# Altium PCB PCB1.PcbDoc
Units mil, origin at the board's own origin, x right, y up, seen from the top; angles counter-clockwise.
Board outline 6000 x 4000 mil, 2 copper layers (Top Layer, Bottom Layer); 58 components, 103 nets, 336 pads, 0 vias.
Unrouted connection lines stored in the file: 212.
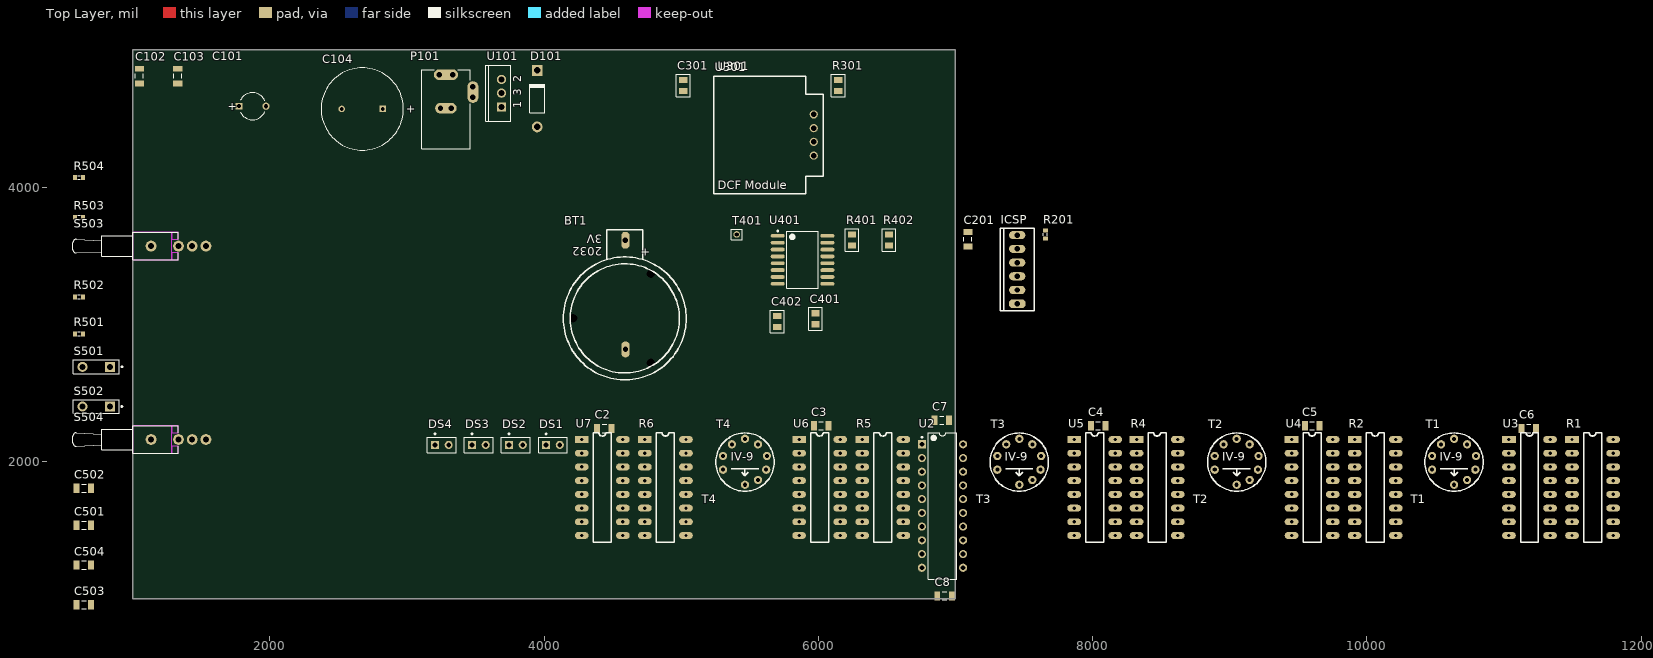
[diagram p0: Top Layer view]
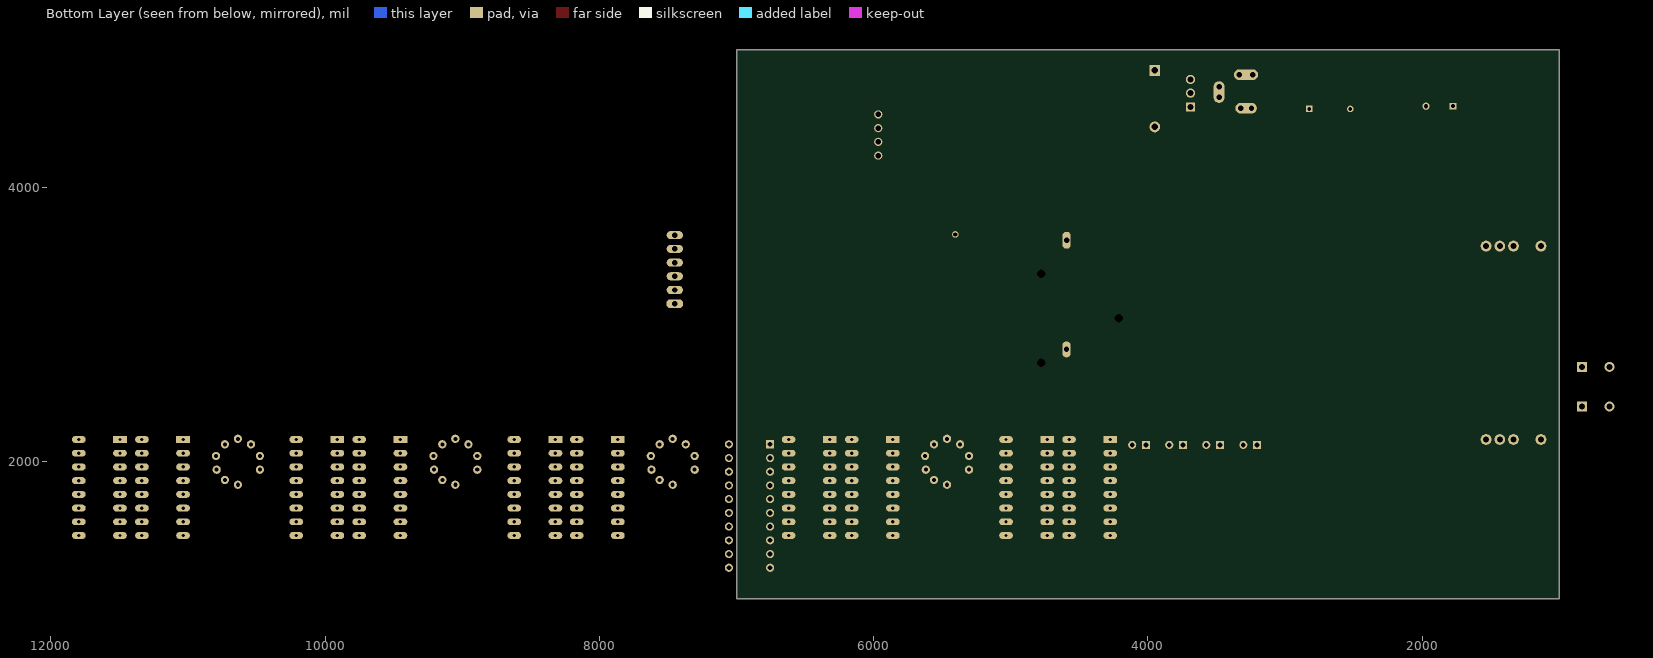
[diagram p1: Bottom Layer view, seen from below]

## Layer stack, top to bottom
Top Layer: signal copper 1.4
Dielectric: dielectric 12.6, FR-4, Dk 4.8
Bottom Layer: signal copper 1.4

## Board outline
1000,1000 7000,1000 7000,5000 1000,5000

## Design rules (kind name [scope] priority, off if disabled: settings)
Clearance [All] p1: gap=10
PolygonConnect [All] p1: connectstyle=Relief reliefconductorwidth=10 reliefentries=4 polygonreliefangle="90 Angle"
RoomDefinition Main [InComponentClass('Main')] p1: confinementstyle=ConfineIn formatcopy=TRUE lockcomponents=FALSE outline 1660,1130 11855,1130 11855,2320 1660,2320
RoomDefinition RTC [InComponentClass('RTC')] p2: confinementstyle=ConfineIn formatcopy=TRUE lockcomponents=FALSE outline 3840,2585 6710,2585 6710,3805 3840,3805
RoomDefinition "Power Supply" [InComponentClass('Power Supply')] p3: confinementstyle=ConfineIn formatcopy=TRUE lockcomponents=FALSE outline 1005,4270 4110,4270 4110,5000 1005,5000
RoomDefinition ICSP [InComponentClass('ICSP')] p4: confinementstyle=ConfineIn formatcopy=TRUE lockcomponents=FALSE outline 7045,3090 7860,3090 7860,3810 7045,3810
RoomDefinition DCF [InComponentClass('DCF')] p5: confinementstyle=ConfineIn formatcopy=TRUE lockcomponents=FALSE outline 4955,3940 6320,3940 6320,4930 4955,4930
RoomDefinition Buttons [InComponentClass('Buttons')] p6: confinementstyle=ConfineIn formatcopy=TRUE lockcomponents=FALSE outline 1585,910 1585,4295 455,4295 455,910
RoutingVias [All] p1: holewidth=28 width=50 viastyle="Through Hole" minholewidth=28 minwidth=50 maxholewidth=28 maxwidth=50
SilkscreenOverComponentPads [All] p1: minsilkscreentomaskgap=10
SolderMaskExpansion [All] p1: expansion=4
Width [All] p1: maxlimit=10 minlimit=10 preferedwidth=10
27 further rules are at their usual default settings.

## Classes and differential pairs
component class RTC: BT1 C401 C402 R401 R402 T401 U401
component class "Power Supply": C101 C102 C103 C104 D101 P101 U101
component class Main: C2 C3 C4 C5 C6 C7 C8 DS1 DS2 DS3 DS4 R1 R2 R4 R5 R6 T1 T2 T3 T4 U2 U3 U4 U5 U6 U7
component class ICSP: C201 ICSP R201
component class DCF: C301 R301 U301
component class Buttons: C501 C502 C503 C504 R501 R502 R503 R504 S501 S502 S503 S504

## Components (designator, comment, footprint, x,y, rotation, side; value= is the part's Value field where it differs from the comment)
BT1 "Battery" 2032HOLDER 4595,3725 r90 top
C2 "Cap Semi" CAPC3216L 4440,2240 r0 top
C3 "Cap Semi" CAPC3216L 6020,2260 r0 top
C4 "Cap Semi" CAPC3216L 8040,2260 r0 top
C5 "Cap Semi" CAPC3216L 9600,2260 r0 top
C6 "Cap Semi" CAPC3216L 11180,2240 r0 top
C7 "Cap Semi" CAPC3216L 6900,2300 r0 top
C8 "Cap Semi" CAPC3216L 6920,1020 r0 top
C101 "Cap Pol1" CAPPR5-5x5 1875,4590 r0 top
C102 "Cap Semi" CAPC3216L 1050,4810 r90 top
C103 "Cap Semi" CAPC3216L 1330,4810 r90 top
C104 "Cap Pol1" RB7.6-15 2675,4570 r0 top
C201 "Cap Semi" CAPC3216L 7090,3620 r90 top
C301 "Cap" "RCL 0805" 5015,4740 r90 top
C401 "Cap" "RCL 0805" 5980,3040 r90 top
C402 "Cap" "RCL 0805" 5700,3020 r90 top
C501 "Cap Semi" CAPC3216L 645,1535 r180 top
C502 "Cap Semi" CAPC3216L 645,1805 r180 top
C503 "Cap Semi" CAPC3216L 645,955 r180 top
C504 "Cap Semi" CAPC3216L 645,1245 r180 top
D101 "Diode 1N4004" DIO10.46-5.3x2.8 3950,4645 r90 top
DS1 "Lamp" PIN2 4015,2120 r0 top
DS2 "Lamp" PIN2 3745,2120 r0 top
DS3 "Lamp" PIN2 3475,2120 r0 top
DS4 "Lamp" PIN2 3205,2120 r0 top
ICSP "Header 6" "MOLEX 22-23-2061" 7450,3400 r90 top
P101 "PWR2.5" KLD-0202 3285,4280 r90 top
R1 "Res Pack3" DIP16 11495,2160 r0 top
R2 "Res Pack3" DIP16 9910,2160 r0 top
R4 "Res Pack3" DIP16 8320,2160 r0 top
R5 "Res Pack3" DIP16 6320,2160 r0 top
R6 "Res Pack3" DIP16 4735,2160 r0 top
R201 "Res3" RESC1608L 7655,3655 r90 top
R301 "Res Semi" "RCL 0805" 6145,4740 r90 top
R401 "Res Semi" "RCL 0805" 6245,3615 r90 top
R402 "Res Semi" "RCL 0805" 6515,3615 r90 top
R501 "Res3" RESC1608L 610,2930 r180 top
R502 "Res3" RESC1608L 610,3200 r180 top
R503 "Res3" RESC1608L 610,3780 r180 top
R504 "Res3" RESC1608L 610,4070 r180 top
S501 "SW-PB" SPST-2 735,2690 r180 top
S502 "SW-PB" SPST-2 735,2400 r180 top
S503 "SW-SPDT" TL36WW15050 1335,3570 r180 top
S504 "SW-SPDT" TL36WW15050 1335,2160 r180 top
T1 "IV-9" IV-9 10635,1995 r0 top
T2 "IV-9" IV-9 9050,1995 r0 top
T3 "IV-9" IV-9 7465,1995 r0 top
T4 "IV-9" IV-9 5465,1995 r0 top
T401 "TESTPOINT" "TEST POINT 1" 5405,3655 r90 top
U2 "PIC18F14K50-I/P" PDIP300-P20 6905,1675 r0 top
U3 "TPIC6C596" DIP16 11035,2160 r0 top
U4 "TPIC6C596" DIP16 9450,2160 r0 top
U5 "TPIC6C596" DIP16 7865,2160 r0 top
U6 "TPIC6C596" DIP16 5860,2160 r0 top
U7 "TPIC6C596" DIP16 4275,2160 r0 top
U101 "L7805ABV" TO220ABN 3690,4685 r90 top
U301 "DCF Module Reichelt" "DCF MODUL REICHELT" 5620,4380 r0 top
U401 "DS3231" WSO16_M 5885,3470 r0 top

## Footprints (in the part's own frame and the unit in brackets; to place one, negate y for a bottom-side part, rotate by r counter-clockwise, add the part's x,y. Pads: shape width x height; smd on the part's side, far side on the other; paste and mask are expansions set on the pad)
2032HOLDER [mm] "Keystone Electronics - Cat No 103 - 20mm Lithium Coin Cell Battery Holder"
  oct 3x1.5 hole 1: 1(-2.846,0.051)
  oval 3x1.5 hole 1: 2(-23.063,0.024)
  round 1.2 hole 1.575 unplated: ""(-25.572,-4.615) ""(-17.323,9.673) ""(-9.074,-4.615)
  silkscreen extent -28.7,-11.23 -0.89,11.53, body extent -28.72,-11.19 -0.87,11.52, height 6
CAPC3216L [mm] "Chip Capacitor, Body 3.2x1.6mm, IPC High Density"
  rect 1.1x1.7 smd: 1(-1.35,0) 2(1.35,0)
  silkscreen extent -0.4,-0.75 0.4,0.75, body extent -1.7,-0.9 1.7,0.9, height 1.3
CAPPR5-5x5 [mm] "Capacitor, Electrolytic, Radial; Body 5 x 5 mm (Dia.xH typ); Pin Spacing 5 mm (typ)"
  rect 1.25x1.25 hole 0.75: 1(-2.5,0)
  round 1.35 hole 0.8: 2(2.5,0)
  silkscreen extent -2.26,-2.5 2.27,2.5
"DCF MODUL REICHELT" [mil] "DCF 77 Empfängermodul Reichelt KUNDOXT / 950-018"
  round 60 hole 39.37: 0(346.46,150) 1(346.46,50) 2(346.46,-50) 3(346.46,-150)
  silkscreen extent -382,-430 417,429
DIO10.46-5.3x2.8 [mm] "Diode, Axial; Body 5.2 x 2.7 mm (LxDia. max), Lead Dia. 0.86 mm (max)"
  round 2 hole 1.2: 1(-5.23,0)
  rect 2x2 hole 1.2: 2(5.23,0)
  silkscreen extent -2.65,-1.4 2.75,1.4
DIP16 [mil]
  rect 100x50 hole 25: 1(0,0)
  oval 100x50 hole 25: 2(0,-100) 3(0,-200) 4(0,-300) 5(0,-400) 6(0,-500) 7(0,-600) 8(0,-700) 9(300,-700) 10(300,-600) 11(300,-500) 12(300,-400) 13(300,-300) 14(300,-200) 15(300,-100) 16(300,0)
  silkscreen extent 85,-750 215,50
IV-9 [mil] "Russian Numitron Display Tube"
  round 60 hole 29.53: 1(0,-165) 2(95,-130) 3(155,-55) 4(160,45) 5(95,130) 6(0,170) 7(-95,130) 8(-160,45) 9(-160,-55)
  silkscreen extent -213,-213 213,213
KLD-0202 [mm] "DC Power Jack, 2.5mm, KLD Series, PCB Mount"
  oval 2x4.5 all layers, no hole: 1(13.7,0)
  round 1.5 hole 1: 1A(13.7,-1.25) 1B(13.7,1.25) 2A(7.5,-1) 2B(7.5,1) 3A(9.5,-5) 3B(11.5,-5)
  oval 2x4 all layers, no hole: 2(7.5,0)
  oval 4x2 all layers, no hole: 3(10.5,-5)
  silkscreen extent 0,-4.5 14.6,4.5
"MOLEX 22-23-2061" [mm] "2.54mm (.100\") Pitch KK® Solid Header, Vertical, with Friction Lock, 2 Circuits, Tin (Sn) Plating"
  oct 1.5x3 hole 1: 1(-6.35,0)
  oval 1.5x3 hole 1: 2(-3.81,0) 3(-1.27,0) 4(1.27,0) 5(3.81,0) 6(6.35,0)
  silkscreen extent -7.62,-3.18 7.62,3.18, body extent -7.62,-3.18 7.62,3.18, height 10.66
PDIP300-P20 [mm] "DIP, 20-Leads, Row Spacing 7.62mm, Pitch 2.54mm, Body 25.9x6.6mm"
  rect 1.5x1.5 hole 0.9: 1(-3.81,11.43)
  round 1.5 hole 0.9: 2(-3.81,8.89) 3(-3.81,6.35) 4(-3.81,3.81) 5(-3.81,1.27) 6(-3.81,-1.27) 7(-3.81,-3.81) 8(-3.81,-6.35) 9(-3.81,-8.89) 10(-3.81,-11.43) 11(3.81,-11.43) 12(3.81,-8.89) 13(3.81,-6.35) 14(3.81,-3.81) 15(3.81,-1.27) 16(3.81,1.27) 17(3.81,3.81) 18(3.81,6.35) 19(3.81,8.89) 20(3.81,11.43)
  silkscreen extent -3.93,-13.6 2.65,13.6, body extent -3.3,-13.57 3.3,13.57, height 5.34
PIN2 [mm] "Photosensitive Diode; 2 Leads"
  rect 1.5x1.5 hole 0.9: 1(0,0)
  round 1.5 hole 0.9: 2(2.54,0)
  silkscreen extent -1.4,-1.4 3.94,2.17
RB7.6-15 [mm] "Polarized Capacitor (Radial); 2 Leads"
  rect 1.2x1.2 hole 0.7: 1(3.81,0)
  round 1.2 hole 0.7: 2(-3.81,0)
  silkscreen extent -7.62,-7.62 7.62,7.62
"RCL 0805" [mil]
  rect 45x60 smd: 1(-40,0) 2(40,0)
  silkscreen extent -82,-50 82,50, body extent -50,-30 50,30, height 31
RESC1608L [mm] "Chip Resistor, Body 1.6x0.8mm, IPC High Density"
  rect 0.7x0.9 smd: 1(-0.75,0) 2(0.75,0)
  silkscreen extent -0.2,-0.35 0.2,0.35, body extent -0.85,-0.48 0.85,0.48, height 0.9
SPST-2 [mm] "Circuit Breaker; 2 Leads"
  rect 1.85x1.85 hole 1.1: 1(-2.54,0)
  round 1.85 hole 1.1: 2(2.54,0)
  silkscreen extent -4.89,-1.27 4.28,1.27
"TEST POINT 1" [mm]
  round 1.2 hole 0.8: 1(0,0)
  silkscreen extent -1,-1 1,1
TL36WW15050 [mm] "SPDT Subminiature Toggle Switch, Right Angle Mounting, Vertical Actuation"
  round 2 hole 1.1: 1(0,0) 2(-2.54,0) 3(-5.08,0) M(5.08,0)
  Top Layer keep-out region: 0,-1.27 0,-2.54 1.27,-2.54 1.27,-1.27
  Top Layer keep-out region: 0,2.54 0,1.27 1.27,1.27 1.27,2.54
  Top Layer keep-out region: 1.27,2.54 1.27,-2.54 8.509,-2.54 8.509,2.54
  silkscreen extent 0,-2.54 19.56,2.54
TO220ABN [mm] "TO, Thru-Hole, Vertical, Heatsink Mounted; 3 In-Line Leads; Pitch 2.54 mm; Pin sequence 1, 3, 2"
  rect 1.7x1.7 hole 1.1: 1(-2.54,0)
  round 1.7 hole 1.1: 2(2.54,0) 3(0,0)
  silkscreen extent -5.2,-1.7 5.2,2.9
WSO16_M [mm] "16-Pin Small Outline Integrated Circuit 1.27 mm Pitch, IPC Low Density"
  oval 2.6x0.7 smd: 1(-4.6,4.445) 2(-4.6,3.175) 3(-4.6,1.905) 4(-4.6,0.635) 5(-4.6,-0.635) 6(-4.6,-1.905) 7(-4.6,-3.175) 8(-4.6,-4.445) 9(4.6,-4.445) 10(4.6,-3.175) 11(4.6,-1.905) 12(4.6,-0.635) 13(4.6,0.635) 14(4.6,1.905) 15(4.6,3.175) 16(4.6,4.445)
  silkscreen extent -4.72,-5.25 2.9,5.47, body extent -3.75,-5.25 3.75,5.25, height 2.65

## Part data
BT1: "Multicell Battery"
C2 C3 C4 C5 C6 C7 C8 C102 C103 C201 C501 C502 C503 C504: "Capacitor (Semiconductor SIM Model)"
C101 C104: "Polarized Capacitor (Radial)"
C301 C401 C402: "Capacitor"
D101: "1 Amp General Purpose Rectifier"
DS1 DS2 DS3 DS4: "Incandescent Bulb"
ICSP: "Header, 6-Pin"
P101: "Low Voltage Power Supply Connector"
R1 R2 R4 R5 R6: "Isolated Resistor Network"
R201 R501 R502 R503 R504: "Resistor"
R301 R401 R402: "Semiconductor Resistor"
S501 S502: "Switch"
S503 S504: "SPDT Subminiature Toggle Switch, Right Angle Mounting, Vertical Actuation"
U2: "USB Flash Microcontroller with nanoWatt XLP Technology, 20-pin PDIP, Industrial Temperature"
U101: "Precision 1A Regulator"
U401: "Extremely Accurate I²C-Integrated RTC/TCXO/Crystal"

## Nets (pads, with @x,y where several pads share a name; then routed paths per layer and width w, separated by ;. In a path a pad name is that pad's centre, name@x,y a point inside that pad or via, vN(x,y) a via of type N, cw(c..) or ccw(c..) an arc to the next point about the centre after c; other vN are vias at no path point)
32KHZ: R401.1 T401.1 U401.1
BTNXT: C501.2 R501.1 S501.2 U2.6
BTSET: C502.2 R502.1 S502.2 U2.5
CLR: U2.12 U3.7 U4.7 U5.7 U6.7 U7.7
DCFSIG: C301.2 R301.1 U2.15 U2.16 U301.1
G: U2.10 U3.8 U4.8 U5.8 U6.8 U7.8
GND: BT1.2 C2.1 C3.1 C4.1 C5.1 C6.1 C7.1 C8.1 C201.1 C301.1 C401.1 C402.1 C501.1 C502.1 C503.1 C504.1 ICSP.3 P101.2 P101.2A P101.2B P101.3 P101.3A P101.3B S501.1 S502.1 S503.3 S504.3 U2.20 U3.16 U4.16 U5.16 U6.16 U7.16 U101.3 U301.3 U401.4 U401.5 U401.6 U401.7 U401.8 U401.9 U401.10 U401.11 U401.12 U401.13
MCLR: C201.2 ICSP.1 R201.1 U2.4
NetC101_1: C101.1 C102.2 D101.2 U101.1
NetC101_2: C101.2 C102.1 C103.1 C104.2
NetD101_1: D101.1 P101.1 P101.1A P101.1B
NetDS1_2: DS1.2 R6.16
NetDS2_2: DS2.2 R6.15
NetDS3_2: DS3.2 R6.14
NetDS4_2: DS4.2 R6.13
NetR1_1: R1.1 U3.14
NetR1_2: R1.2 U3.13
NetR1_3: R1.3 U3.12
NetR1_4: R1.4 U3.11
NetR1_5: R1.5 U3.6
NetR1_6: R1.6 U3.5
NetR1_7: R1.7 U3.4
NetR1_8: R1.8 U3.3
NetR1_9: R1.9 T1.2
NetR1_10: R1.10 T1.7
NetR1_11: R1.11 T1.6
NetR1_12: R1.12 T1.9
NetR1_13: R1.13 T1.8
NetR1_14: R1.14 T1.4
NetR1_15: R1.15 T1.3
NetR1_16: R1.16 T1.5
NetR2_1: R2.1 U4.14
NetR2_2: R2.2 U4.13
NetR2_3: R2.3 U4.12
NetR2_4: R2.4 U4.11
NetR2_5: R2.5 U4.6
NetR2_6: R2.6 U4.5
NetR2_7: R2.7 U4.4
NetR2_8: R2.8 U4.3
NetR2_9: R2.9 T2.2
NetR2_10: R2.10 T2.7
NetR2_11: R2.11 T2.6
NetR2_12: R2.12 T2.9
NetR2_13: R2.13 T2.8
NetR2_14: R2.14 T2.4
NetR2_15: R2.15 T2.3
NetR2_16: R2.16 T2.5
NetR4_1: R4.1 U5.14
NetR4_2: R4.2 U5.13
NetR4_3: R4.3 U5.12
NetR4_4: R4.4 U5.11
NetR4_5: R4.5 U5.6
NetR4_6: R4.6 U5.5
NetR4_7: R4.7 U5.4
NetR4_8: R4.8 U5.3
NetR4_9: R4.9 T3.2
NetR4_10: R4.10 T3.7
NetR4_11: R4.11 T3.6
NetR4_12: R4.12 T3.9
NetR4_13: R4.13 T3.8
NetR4_14: R4.14 T3.4
NetR4_15: R4.15 T3.3
NetR4_16: R4.16 T3.5
NetR5_1: R5.1 U6.14
NetR5_2: R5.2 U6.13
NetR5_3: R5.3 U6.12
NetR5_4: R5.4 U6.11
NetR5_5: R5.5 U6.6
NetR5_6: R5.6 U6.5
NetR5_7: R5.7 U6.4
NetR5_8: R5.8 U6.3
NetR5_9: R5.9 T4.2
NetR5_10: R5.10 T4.7
NetR5_11: R5.11 T4.6
NetR5_12: R5.12 T4.9
NetR5_13: R5.13 T4.8
NetR5_14: R5.14 T4.4
NetR5_15: R5.15 T4.3
NetR5_16: R5.16 T4.5
NetR6_1: R6.1 U7.14
NetR6_2: R6.2 U7.13
NetR6_3: R6.3 U7.12
NetR6_4: R6.4 U7.11
NetR6_5: R6.5 U7.6
NetR6_6: R6.6 U7.5
NetR6_7: R6.7 U7.4
NetR6_8: R6.8 U7.3
NetU3_9: U3.9 U4.2
NetU4_9: U4.9 U5.2
NetU5_9: U5.9 U6.2
NetU6_9: U6.9 U7.2
PGC: ICSP.5 U2.18
PGD: ICSP.4 U2.19
PGM: ICSP.6 U2.7
RCK: U2.3 U3.10 U4.10 U5.10 U6.10 U7.10
RTCINT: R402.1 U2.14 U401.3
SCL: U2.11 U401.16
SDA: U2.13 U401.15
SRCK: U2.2 U3.15 U4.15 U5.15 U6.15 U7.15
SWDEB: C504.2 R504.1 S504.2 U2.8
SWROT: C503.2 R503.1 S503.2 U2.9
VBAT: BT1.1 C401.2 U401.14
VCC: C2.2 C3.2 C4.2 C5.2 C6.2 C7.2 C8.2 C103.2 C104.1 C402.2 DS1.1 DS2.1 DS3.1 DS4.1 ICSP.2 R201.2 R301.2 R401.2 R402.2 R501.2 R502.2 R503.2 R504.2 T1.1 T2.1 T3.1 T4.1 U2.1 U2.17 U3.1 U4.1 U5.1 U6.1 U7.1 U101.2 U401.2
pads on no net: BT1. R6.9 R6.10 R6.11 R6.12 S503.1 S503.M S504.1 S504.M U3.2 U7.9 U301.0 U301.2

## Text inside footprints (layer, text, board x,y; h text height)
BT1: Top Overlay "3V" at 4423.75,3652.03 h60 r180; Top Overlay "2032" at 4423.75,3560.64 h60 r180; Top Overlay "+" at 4775.9,3550.64 h60 r180
C101: Top Overlay "+" at 1695.87,4560.47 h59.06
C104: Top Overlay "+" at 2995.15,4540.99 h59.06
P101: Mechanical 1 "Mech 2 - Clearance, move to internal plane if present" at 3085.56,4291.26 h11.81 r90; Mechanical 1 "Mech 1 - Slot cut-out" at 3065.87,4291.26 h11.81 r90; Mechanical 1 "Assign keep-out area to slot" at 3026.5,4291.26 h11.81 r90; Mechanical 1 "Alert PCB fab to slot details" at 3046.18,4291.26 h11.81 r90
U101: Top Overlay "1" at 3834.69,4575.16 h59.06 r90; Top Overlay "2" at 3834.68,4765.32 h59.06 r90; Top Overlay "3" at 3834.68,4665.31 h59.06 r90
U301: Top Overlay "DCF Module" at 5265.67,3986.3 h60